# Altium PCB Display.PcbDoc
Units mm, origin at the board's own origin, x right, y up, seen from the top; angles counter-clockwise.
Board outline 30 x 100 mm, 2 copper layers (Top Layer, Bottom Layer); 12 components, 19 nets, 69 pads, 9 vias.
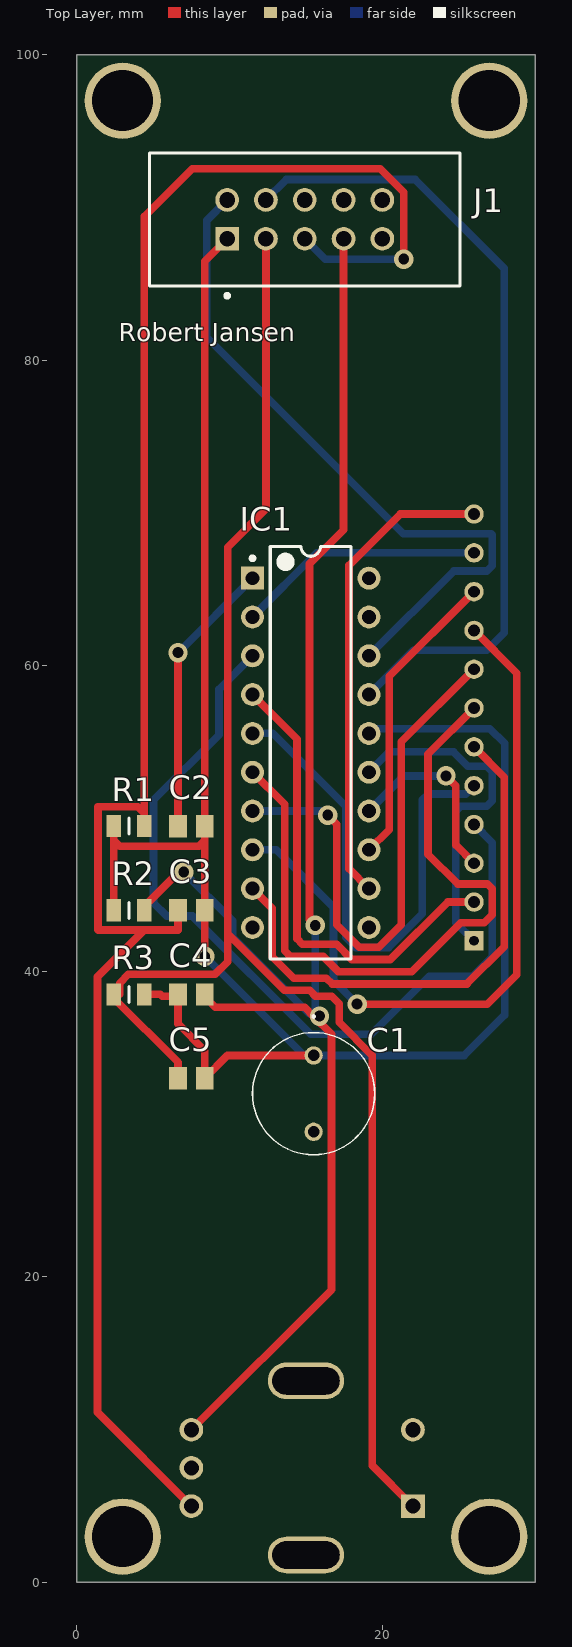
[diagram p0: Top Layer view]
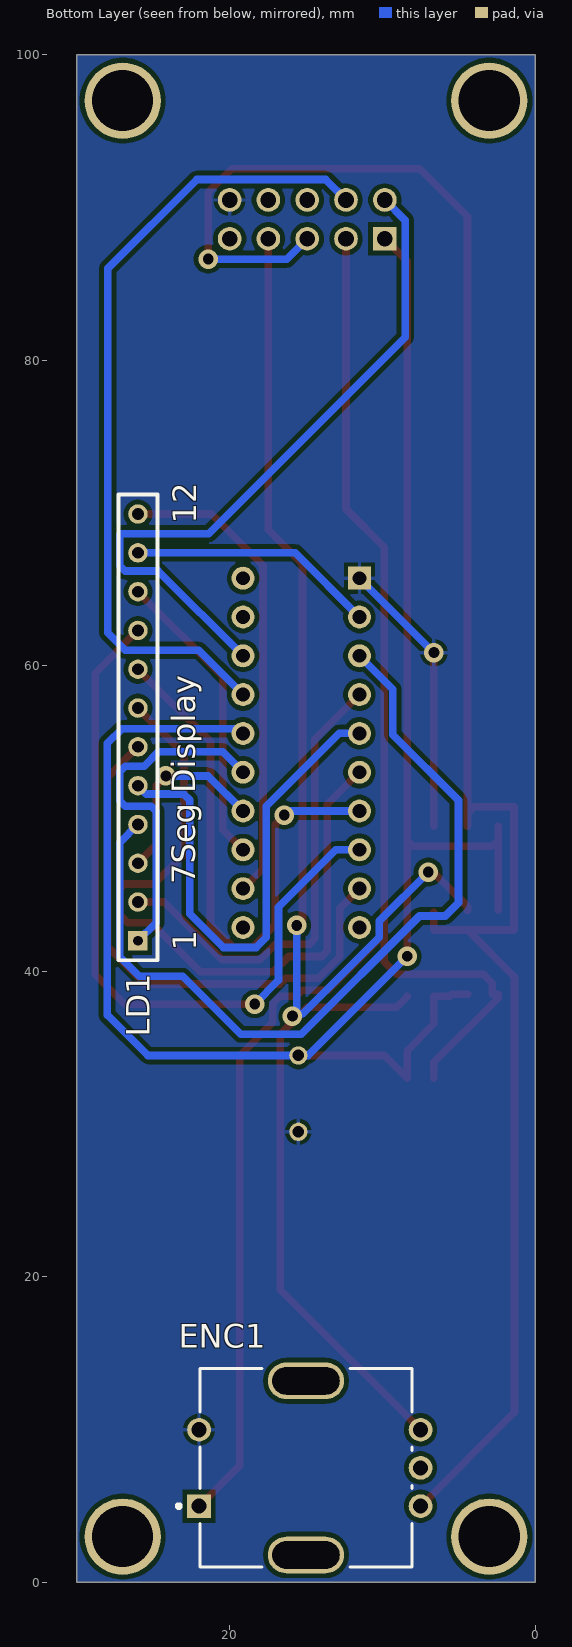
[diagram p1: Bottom Layer view, seen from below]
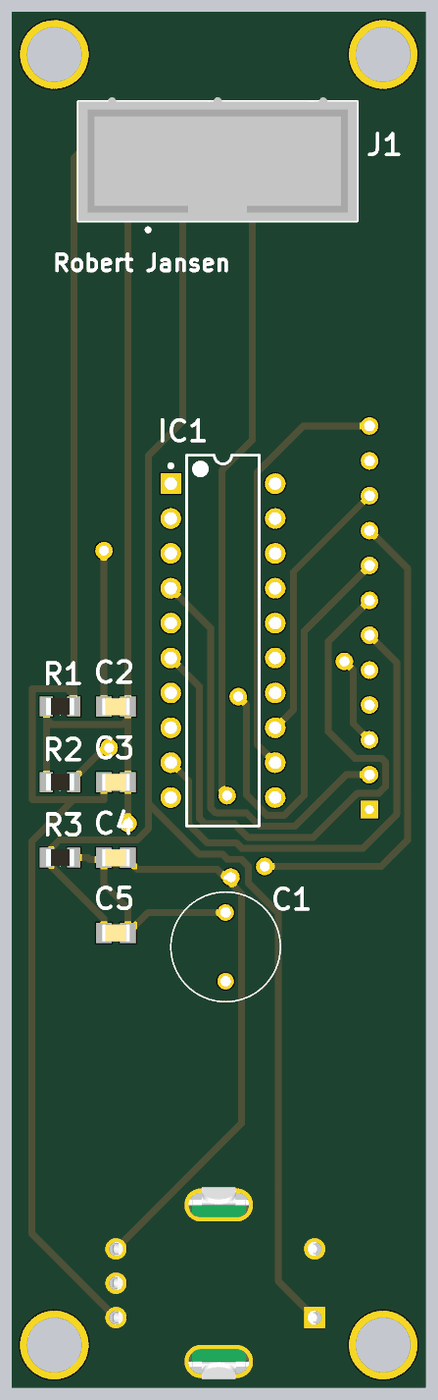
[diagram p2: 3D render of the assembled board from above, using the file's embedded part models]

## Layer stack, top to bottom
Top Solder: solder mask 0.0102, Solder Resist, Dk 3.5
Top Layer: signal copper 0.0356
Dielectric 1: dielectric 0.32, FR-4, Dk 4.8
Bottom Layer: signal copper 0.0356
Bottom Solder: solder mask 0.0102, Solder Resist, Dk 3.5

## Board outline
0,100 30,100 30,0 0,0

## Design rules (kind name [scope] priority, off if disabled: settings)
Clearance [All] p1: gap=0.3 ignorepadtopadclearanceinfootprint=FALSE
Height [All] p1: minheight=0 maxheight=60 prefheight=12.7
HoleSize [All] p1: absolutevalues=TRUE maxlimit=6 minlimit=0.025 maxpercent=80.000 minpercent=20.000
PolygonConnect [All] p1: connectstyle=Relief reliefconductorwidth=0.254 reliefentries=4 polygonreliefangle="90 Angle" airgapwidth=0.254
RoutingVias [All] p1: holewidth=0.711 width=1.27 viastyle="Through Hole" minholewidth=0.711 minwidth=1.27 maxholewidth=0.711 maxwidth=1.27
SolderMaskExpansion [All] p1: expansion=0.102 istentingtop=FALSE
Width [All] p1: maxlimit=1 minlimit=0.254 preferedwidth=0.5
28 further rules are at their usual default settings.

## Components (designator, comment, footprint, x,y, rotation, side; value= is the part's Value field where it differs from the comment)
C1 "100uF 25V" TAP106M050BRW 15.5,34.5 r270 top
C2 "100nF" CAPC2012X88N 7.5,49.5 r0 top
C3 "10nF" CAPC2012X88N 7.5,43.99 r0 top
C4 "10nF" CAPC2012X88N 7.5,38.49 r180 top
C5 "10nF" CAPC2012X88N 7.5,33.012 r0 top
ENC1 "PEC11R-4220F-S0012" PEC11R_4220F_S0012 15,7.5 r90 bottom
IC1 "led driver TM1637" N-20 15.31,54.31 r0 top
J1 "1-1634688-0" TECO-1-1634688-0-10_V 14.92,89.23 r0 top
LD1 "7Seg" KW4-801AVB/KW4-801CVB 26,55.97 r90 bottom
R1 "10K" RESC2012X50N 3.423,49.51 r180 top
R2 "10K" RESC2012X50N 3.423,44 r180 top
R3 "10K" RESC2012X50N 3.423,38.5 r0 top

## Footprints (in the part's own frame and the unit in brackets; to place one, negate y for a bottom-side part, rotate by r counter-clockwise, add the part's x,y. Pads: shape width x height; smd on the part's side, far side on the other; paste and mask are expansions set on the pad)
CAPC2012X88N [mm]
  rect 1.16x1.47 smd: 1(-0.875,0) 2(0.875,0)
  body extent -1.02,-0.64 1.02,0.64, height 1.4
KW4-801AVB/KW4-801CVB [mil] "7_segent display"
  rect 50x50 hole 25: 1(-550,0)
  round 50 hole 30: 2(-450,0) 3(-350,0) 4(-250,0) 5(-150,0) 6(-50,0) 7(50,0) 8(150,0) 9(250,0) 10(350,0) 11(450,0) 12(550,0)
  silkscreen extent -600,-50 600,50, body extent -1409,-931 1409,81, height 335
N-20 [mm] "DIP, 20-Leads, Row Spacing 7.62mm, Pitch 2.54mm, Body 25.9x6.6mm"
  rect 1.5x1.5 hole 0.9: 1(-3.81,11.43)
  round 1.5 hole 0.9: 2(-3.81,8.89) 3(-3.81,6.35) 4(-3.81,3.81) 5(-3.81,1.27) 6(-3.81,-1.27) 7(-3.81,-3.81) 8(-3.81,-6.35) 9(-3.81,-8.89) 10(-3.81,-11.43) 11(3.81,-11.43) 12(3.81,-8.89) 13(3.81,-6.35) 14(3.81,-3.81) 15(3.81,-1.27) 16(3.81,1.27) 17(3.81,3.81) 18(3.81,6.35) 19(3.81,8.89) 20(3.81,11.43)
  silkscreen extent -3.93,-13.5 2.65,13.5, body extent -3.55,-13.45 3.55,13.45, height 5.33
PEC11R_4220F_S0012 [mm]
  rect 1.55x1.55 hole 1 paste-2539.97 mask+0: 1(-2.5,7)
  round 1.55 hole 1 paste-2539.97 mask+0: 2(2.5,7) A(-2.5,-7.5) B(2.5,-7.5) C(0,-7.5)
  rrect100% 2.4x5 hole 4.4 slot 1.8 at 0 deg paste-2539.97 mask+0: 3(-5.7,0) 4(5.7,0)
  silkscreen extent -6.5,-6.95 6.5,8.45, body extent -7,-7.7 7,7.2, height 27.3
RESC2012X50N [mm]
  rect 0.95x1.45 smd: 1(-1,0) 2(1,0)
  silkscreen extent 0,-0.53 0,0.52, body extent -1.02,-0.63 1.02,0.63, height 0.5
TAP106M050BRW [mm]
  round 1.2 hole 0.75: 1(0,0) 2(5,0)
  silkscreen extent -2.6,-4 6.5,4
TECO-1-1634688-0-10_V [mm] "10-Pin Connector, Body 20.35x8.7mm, Pitch 2.54mm"
  rect 1.55x1.55 hole 1.02: 1(-5.08,-1.27)
  round 1.55 hole 1.02: 2(-5.08,1.27) 3(-2.54,-1.27) 4(-2.54,1.27) 5(0,-1.27) 6(0,1.27) 7(2.54,-1.27) 8(2.54,1.27) 9(5.08,-1.27) 10(5.08,1.27)
  silkscreen extent -10.18,-5.12 10.18,4.35, body extent -10.17,-4.35 10.18,4.65, height 9

## Part data
C1: library part "capacitor THT radial tantalum", "Tantalum Capacitors - Solid Leaded 50V 10uF 20% ESR=1.6 Ohm TAP106M050BRW", Manufacturer_Name="Kyocera AVX", Manufacturer_Part_Number=TAP106M050BRW, Mouser Part Number=581-TAP106M050BRW, Datasheet Link=https://www.mouser.be/datasheet/2/40/tap-776819.pdf, Geometry.Height=15.5mm, Mouser Price/Stock=https://www.mouser.co.uk/ProductDetail/AVX/TAP106M050BRW?qs=GjEaAqXp9rZGx11KfVU76g%3D%3D
C2 C3 C4 C5: library part "Capacitor ceramic 0805", Manufacturer=Kemet, Part Number=C0402C104K4RACTU
ENC1: library part RotEncoderButtom, "ROTARY ENCODER MECHANICAL 12PPR PEC11R-4220F-S0012", Max Operating Temperature=70°C, Min Operating Temperature=-30°C, Package Quantity=150, Built in Switch=Yes, Detent=Yes, Encoder Type=Mechanical, Height=13.4mm, Hole Diameter=7mm, Length=26.5mm, Mount="Through Hole", Number of Channels=2, Number of Pins=5, Orientation=Vertical, Output Type=Quadrature, Packaging=Bulk, Pulses per Revolution=12, Radiation Hardening=No, REACH SVHC="No SVHC", RoHS Compliant=Yes, Series=PEC11R, Termination="PC Pin", Type=Mechanical, Width=12.5mm
IC1: "LED Drive Control Special Circuit", Package=Package, Availability="Not in stock", Check_prices=https://www.snapeda.com/parts/TM1637/Titan+Micro+Electronics/view-part/?ref=eda, MF="Titan Micro Electronics", MP=TM1637, Price=None, SnapEDA_Link=https://www.snapeda.com/parts/TM1637/Titan+Micro+Electronics/view-part/?ref=snap
J1: library part "pin header 2X5 10pins", "CMP-2000-05854-1 Male Header, Pitch 2.54 mm, 2 x 5 Postion, Height 9.15 mm, Tail Length 3.2 mm, -40 to 105 degC, RoHS, Bulk", Manufacturer="TE Connectivity", Package Description="10-Pin Connector, Body 20.35 x 8.7 mm, Pitch 2.54 mm", Package Version="Rev. C2, 02/2011", Contact Material=Brass, Contact Plating=GoldPlatedContacts, Contact Termination Type=ThroughHole, Datasheet URL=https://datasheet.ciiva.com/6831/eng-cd-1634688-c2-6831201.pdf, Datasheet Version="Rev. C2, 02/2011", Gender=Header, Manufacturer URL=http://www.te.com/, Mounting Technology=ThroughHole, No. of Contacts=10Contacts, No. of Positions=10, No. of Rows=2, Orientation=Straight, Package Reference=1-1634688-0, Package URL=https://datasheet.ciiva.com/6831/eng-cd-1634688-c2-6831201.pdf, PartNumber=1-1634688-0, Pitch=2.54mm, Pitch Spacing=2.54mm, Product Range=-, SVHC=ToBeAdvised
LD1: library part "Display LED 4-Digit", "4-Digit LED Display TME KW4-801AVB"
R1 R2 R3: library part "resistor 0805", Manufacturer="Vishay Dale", Part Number=CRCW08050000Z0EA

## Free pads (board coordinates)
  round 5 hole 4: 17(3,97) 18(27,97) 19(27,3) 20(3,3)

## Via types
v1: diameter 1.27, hole 0.711, Top Layer to Bottom Layer, 9 vias

## Nets (pads, with @x,y where several pads share a name; then routed paths per layer and width w, separated by ;. In a path a pad name is that pad's centre, name@x,y a point inside that pad or via, vN(x,y) a via of type N, cw(c..) or ccw(c..) an arc to the next point about the centre after c; other vN are vias at no path point)
+5: C1.1 C2.2 C3.2 C4.2 C5.2 IC1.16 J1.1 R1.2 R2.2 R3.2 | length 126.2
  Top Layer w0.5: R2.2 2.423,48.58 ; R1.2@2.423,49.5 2.423,48.58 ; R3.2 5.448,38.5 5.581,38.367 6.625,38.367 6.625,36.563 8.375,34.813 C5.2 9.863,34.5 C1.1 ; v1(8.375,40.99) 8.375,43.867 8.375,48.58 ; J1.1 8.375,86.495 C2.2 8.375,48.58 ; 2.423,48.58 2.804,48.199 7.994,48.199 8.375,48.58
  Bottom Layer w0.5: v1(8.375,40.99) 14.865,34.5 C1.1 25.353,34.5 28.003,37.15 28.003,54.93 27.038,55.895 19.12,55.895 IC1.16
GND: C1.2 C2.1 ENC1.2 IC1.1 J1.10 | length 18.3
  Top Layer w0.5: C2.1 v1(6.625,60.865)
  Bottom Layer w0.5: v1(6.625,60.865) IC1.1
NetC3_1: C3.1 ENC1.A J1.5 R1.1 | length 129.4
  Top Layer w0.5: R1.1@4.423,49.5 4.423,50.342 ; C3.1@6.625,43.867 6.625,42.713 4.407,42.713 ; ENC1.A 1.354,11.146 1.354,39.659 4.407,42.713 ; v1(21.399,86.629) 21.399,90.998 19.85,92.547 7.556,92.547 4.423,89.414 4.423,50.342 ; 4.407,42.713 1.41,42.713 1.384,42.738 1.384,50.79 3.975,50.79 4.423,50.342
  Bottom Layer w0.5: J1.5 16.251,86.629 v1(21.399,86.629)
NetC4_1: C4.1 ENC1.B J1.7 R2.1 | length 108.7
  Top Layer w0.5: R2.1 4.423,44.25 6.526,46.353 6.853,46.353 v1(7,46.5) ; ENC1.B 16.675,19.175 16.675,35.876 v1@15.477,37.074 ; C4.1@8.375,38.367 8.375,38.344 9.074,37.644 14.907,37.644 v1@15.477,37.074 ; v1(15.608,43.017) 15.232,43.394 15.232,66.695 17.46,68.923 J1.7 ; v1(15.888,37.074) v1@15.477,37.074
  Bottom Layer w0.5: v1(7,46.5) 10.2,43.3 10.2,42.236 15.215,37.221 15.74,37.221 v1(15.888,37.074) 15.608,37.353 v1(15.608,43.017)
NetC5_1: C5.1 ENC1.1 J1.3 R3.1 | length 108.4
  Top Layer w0.5: C5.1 6.625,34.04 2.423,38.242 R3.1 2.807,38.5 2.807,39.233 3.379,39.805 9.043,39.805 9.868,40.63 9.868,42.47 ; J1.3 12.38,70.272 9.868,67.759 9.868,42.47 ; ENC1.1 19.342,7.658 19.342,34.492 17.166,36.667 17.166,37.889 16.675,38.38 15.623,38.38 15.241,38.762 13.576,38.762 9.868,42.47
NetIC1_2: IC1.2 LD1.11 | length 16.2
  Bottom Layer w0.5: IC1.2 15.7,67.4 LD1.11
NetIC1_3: IC1.3 LD1.4 | length 55.8
  Bottom Layer w0.5: IC1.3 9.309,58.469 9.309,55.489 5.016,51.196 5.016,44.491 5.88,43.627 7.568,43.627 15.306,35.889 19.275,35.889 23.076,39.69 25.921,39.69 27.191,40.96 27.191,48.429 LD1.4
NetIC1_4: IC1.4 LD1.2 | length 30.9
  Top Layer w0.5: IC1.4 14.414,55.206 14.414,42.131 14.77,41.776 17.005,41.776 18,40.78 20.518,40.78 24.278,44.54 LD1.2
NetIC1_5: IC1.5 LD1.5 | length 34.1
  Bottom Layer w0.5: IC1.5 12.829,55.58 17.606,50.802 17.606,42.23 18.266,41.57 20.409,41.57 22.619,43.779 22.619,51.22 23.01,51.611 25.451,51.611 LD1.5
NetIC1_6: IC1.6 LD1.7 | length 45.9
  Top Layer w0.5: IC1.6 13.6,50.94 13.6,41.343 13.967,40.976 16.133,40.976 17.129,39.98 21.918,39.98 25.123,43.185 26.672,43.185 27.185,43.698 27.185,45.405 26.865,45.725 24.93,45.725 22.983,47.672 22.983,54.223 LD1.7
NetIC1_7: IC1.7 LD1.8 | length 36.6
  Top Layer w0.5: v1(16.421,50.231) 17.018,49.634 17.018,43.056 18.493,41.58 19.77,41.58 21.248,43.058 21.248,55.028 LD1.8
  Bottom Layer w0.5: IC1.7 16.152,50.5 v1(16.421,50.231)
NetIC1_8: IC1.8 LD1.9 | length 48.8
  Top Layer w0.5: v1(18.351,37.861) 26.86,37.861 28.791,39.792 28.791,59.529 LD1.9
  Bottom Layer w0.5: IC1.8 13.053,47.96 16.802,44.211 16.802,39.411 v1(18.351,37.861)
NetIC1_9: IC1.9 LD1.6 | length 35.8
  Top Layer w0.5: IC1.9 12.8,44.12 12.8,40.96 14.198,39.562 16.329,39.562 16.711,39.18 25.538,39.18 27.985,41.627 27.985,52.715 LD1.6
NetIC1_12: IC1.12 LD1.12 | length 31.3
  Top Layer w0.5: IC1.12 17.818,46.722 17.818,66.589 21.169,69.94 LD1.12
NetIC1_13: IC1.13 LD1.10 | length 19.7
  Top Layer w0.5: IC1.13 20.448,49.288 20.448,59.308 LD1.10
NetIC1_14: IC1.14 LD1.3 | length 12.5
  Top Layer w0.5: v1(24.168,52.796) 24.803,52.161 24.803,48.277 LD1.3
  Bottom Layer w0.5: IC1.14 21.416,52.796 v1(24.168,52.796)
NetIC1_15: IC1.15 LD1.1 | length 22.7
  Bottom Layer w0.5: IC1.15 20.451,54.371 24.653,54.371 25.593,53.431 26.835,53.431 27.191,53.076 27.191,51.161 26.835,50.805 25.123,50.805 24.803,50.485 24.803,43.197 LD1.1
NetIC1_17: IC1.17 J1.4 | length 53
  Bottom Layer w0.5: J1.4 13.716,91.836 22.161,91.836 27.985,86.013 27.985,62.176 26.835,61.026 22.026,61.026 IC1.17
NetIC1_18: IC1.18 J1.2 | length 46.1
  Bottom Layer w0.5: J1.2 8.496,89.156 8.496,81.524 21.374,68.646 27.134,68.646 27.185,68.595 27.185,66.558 26.835,66.208 24.668,66.208 IC1.18
pads on no net: ENC1.3 ENC1.4 ENC1.C IC1.10 IC1.11 IC1.19 IC1.20 J1.6 J1.8 J1.9

## Polygon pours and split planes (outlines as drawn)
GND on Bottom Layer "GND_L02_P000" (solid, pour order 0): 0,100 30,100 30,0 0,0

## Silkscreen, mask and mechanical layers (free items; w line width, h text height)
Top Overlay:
  text "Robert Jansen" at 2.754,81.254 h1.2
Board:
  the board outline again, w0.2

## Text inside footprints (layer, text, board x,y; h text height)
LD1: Bottom Overlay "7Seg Display" at 22.262,45.694 h1.52 r270; Bottom Overlay "1" at 22.19,41.365 h1.52 r270; Bottom Overlay "12" at 22.19,69.305 h1.52 r270